# Altium PCB AD8310.PcbDoc
Units mil, origin at the board's own origin, x right, y up, seen from the top; angles counter-clockwise.
Board outline 1840 x 2314 mil, 2 copper layers (Top Layer, Bottom Layer); 26 components, 12 nets, 84 pads, 545 vias.
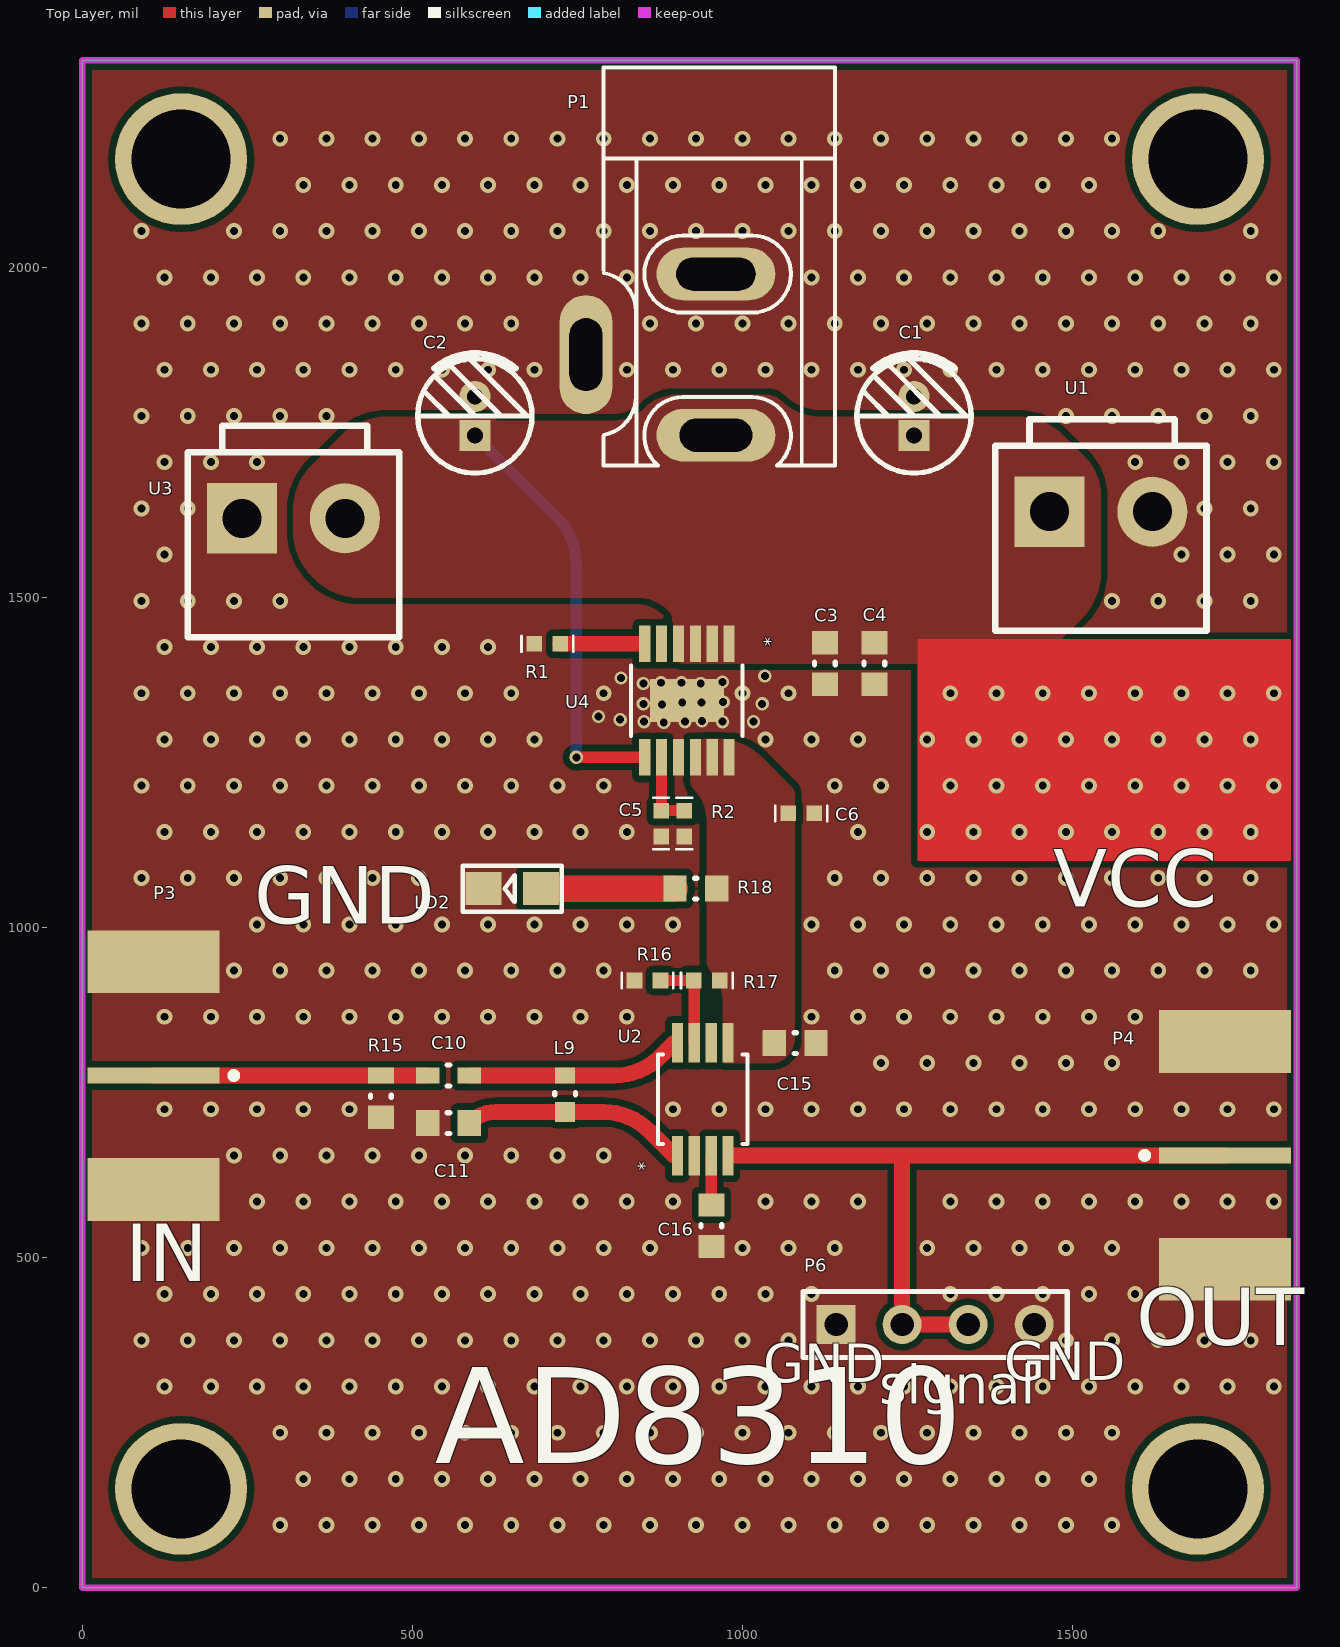
[diagram p0: Top Layer view]
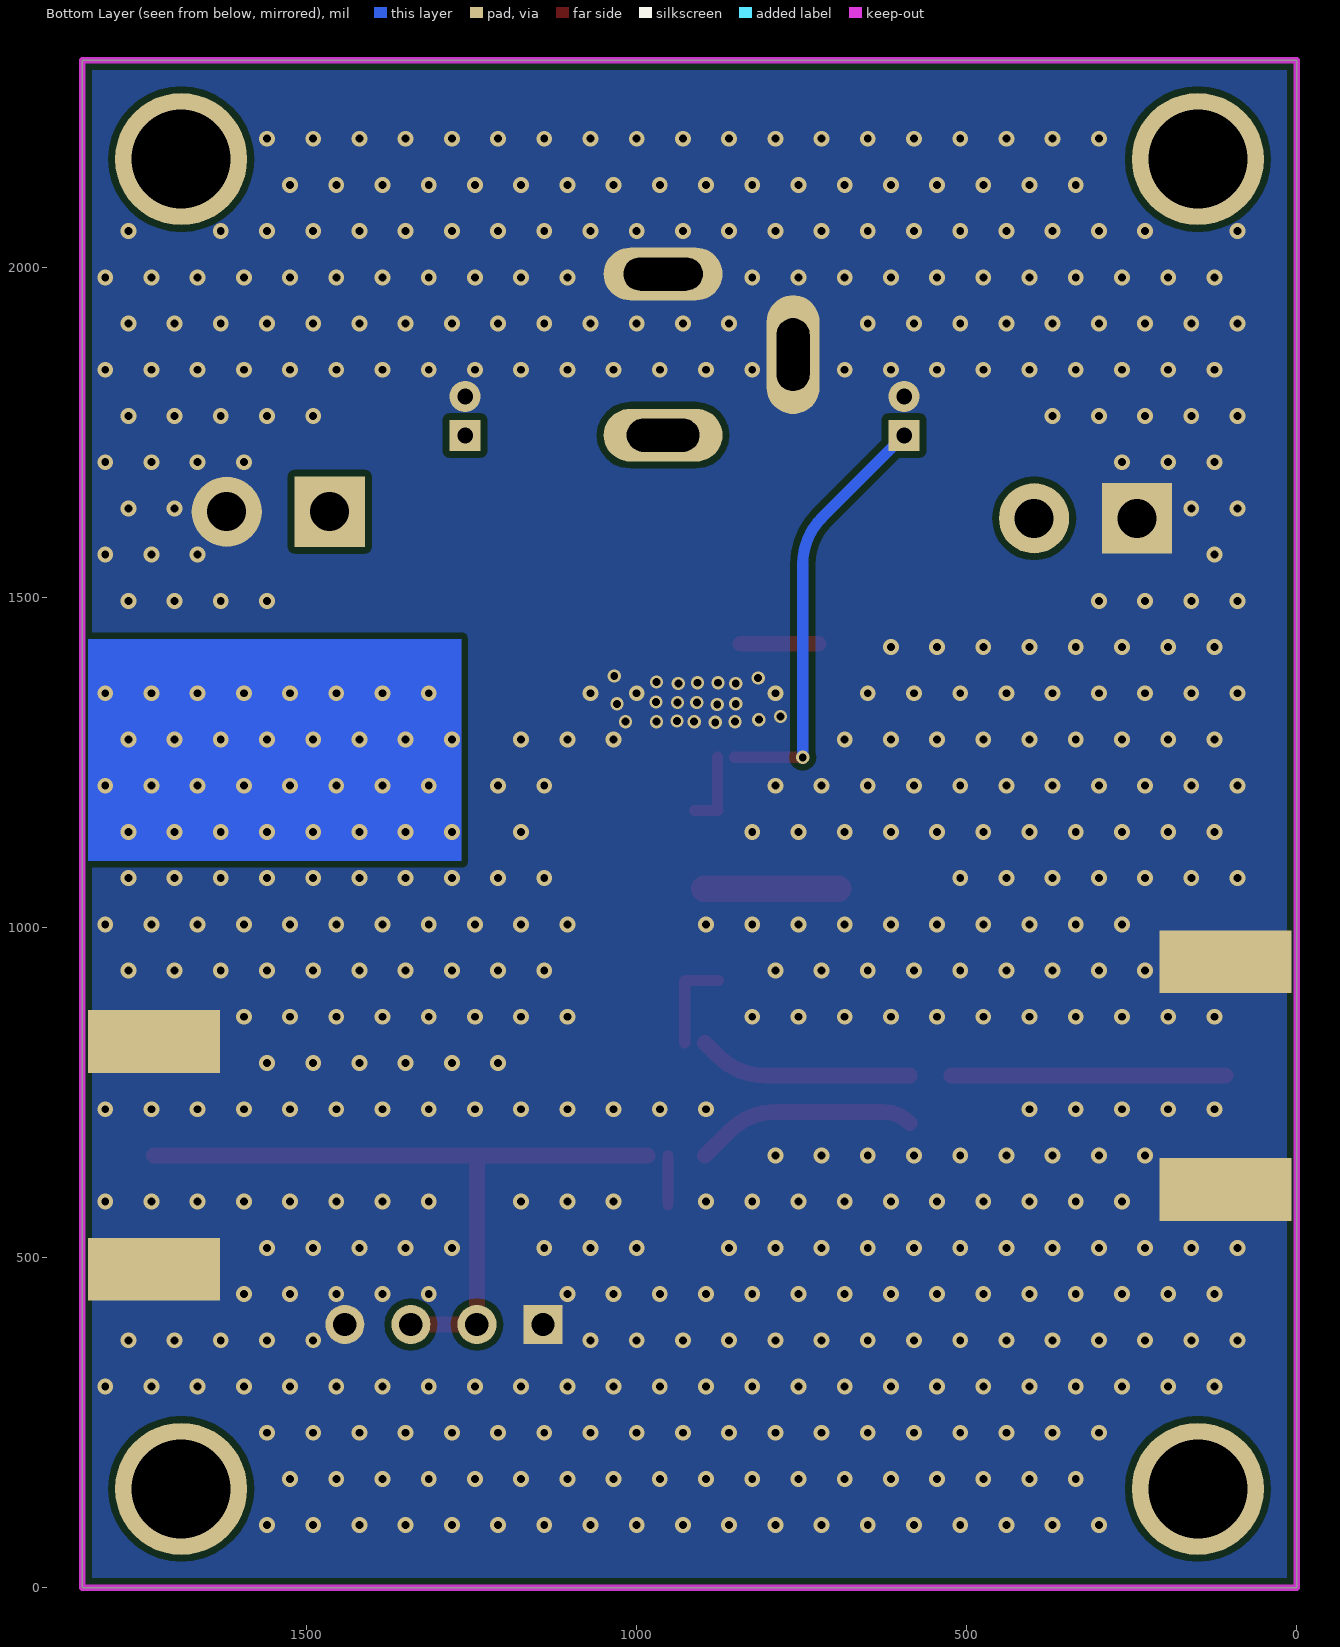
[diagram p1: Bottom Layer view, seen from below]

## Layer stack, top to bottom
Top Solder: solder mask 0.4, Solder Resist, Dk 3.5
Top Layer: signal copper 1.4
Dielectric 1: dielectric 12.6, FR-4, Dk 4.8
Bottom Layer: signal copper 1.4
Bottom Solder: solder mask 0.4, Solder Resist, Dk 3.5

## Board outline
0,0 1840,0 1840,2314 0,2314

## Design rules (kind name [scope] priority, off if disabled: settings)
Clearance [All] p1: gap=10 ignorepadtopadclearanceinfootprint=FALSE except(0: Arc-Hole Track-Hole SMDPad-Hole THPad-Hole Via-Hole Fill-Hole Poly-Hole Region-Hole Text-Hole)
PlaneConnect [All] p1: planeconnectstyle=Direct reliefexpansion=20 reliefentries=4 reliefconductorwidth=10 reliefairgap=10
PolygonConnect [All] p1: connectstyle=Direct reliefconductorwidth=10 reliefentries=4 polygonreliefangle="90 Angle" airgapwidth=10
RoutingVias [All] p1: holewidth=28 width=50 viastyle="Through Hole" minholewidth=28 minwidth=50 maxholewidth=28 maxwidth=50
SolderMaskExpansion [All] p1: expansion=4
Width [All] p1: maxlimit=90 minlimit=10 preferedwidth=17
29 further rules are at their usual default settings.

## Components (designator, comment, footprint, x,y, rotation, side; value= is the part's Value field where it differs from the comment)
C1 "0" "CAP 1.5*4*8" 1260,1775 r90 top
C2 "0" "CAP 1.5*4*8" 595,1775 r90 top
C3 "0" 0603C#1 1125,1400 r270 top
C4 "4.7uf" 0603C#1 1200,1400 r270 top
C5 "0.47uF" 0402 877,1177.37 r270 top
C6 "10uF" 0402 1109,1173 r180 top
C10 "uf" 0603C#2 555,776 r0 top
C11 "uf" 0603C#1 555,704 r0 top
C15 "uf" 0603C#1 1080,825 r180 top
C16 "100pF" 0603C#1 953,548.5 r90 top
L9 "BEAD" 0603L 731.5,748.5 r270 top value=100uH
LD2 "LED" SMDLED 695.04,1058.94 r180 top
P1 "DC005" DC10B 790,2165 r270 top
P3 "SMA" SMA 204,771 r0 top
P4 "SMA" SMA 1635,660 r180 top
P6 "Header 4" HDR1X4 1142,399 r0 top
R1 "0.5K" 0402 685,1430 r0 top
R2 "50K" 0402 912,1138 r90 top
R15 "1k" 0603R#1 452.5,744.5 r90 top
R16 "1k" 0402 836.63,920 r0 top
R17 "1k" 0402 926.63,920 r0 top
R18 "1k" 0603R#2 929.5,1059 r0 top
U1 "3.96" 3.96 1542.95,1630 r0 top
U2 "AD8310ARMZ" RM_8_ADI 940,740 r90 top
U3 "3.96" 3.96 320,1620 r0 top
U4 "LT3045EMSE" MSOP12-MSE-RevG_ADI 916.02,1343.98 r270 top

## Footprints (in the part's own frame and the unit in brackets; to place one, negate y for a bottom-side part, rotate by r counter-clockwise, add the part's x,y. Pads: shape width x height; smd on the part's side, far side on the other; paste and mask are expansions set on the pad)
3.96 [mm] "接插件，25V/5A"
  rect 2.7x2.7 hole 1.5: 1(-1.98,0)
  round 2.7 hole 1.5: 2(1.982,0)
  silkscreen extent -4.06,-4.57 4.07,3.56, body extent -3.98,-4.4 4.03,4.16, height 10.5
0402 [mm]
  rect 0.6x0.6 smd: 1(0,0) 2(1,0)
  silkscreen extent -0.5,-0.3 1.5,0.3
0603C#1 [mm] "Chip Capacitor, Body 1.6x0.8mm, Height 1.0mm, IPC Medium Density"
  rect 0.9x1 smd: 1(-0.8,0) 2(0.8,0)
  silkscreen extent -0.05,-0.4 0.05,0.4, body extent -0.87,-0.48 0.88,0.47, height 1
0603C#2 [mm] "Chip Capacitor, Body 1.6x0.8mm, Height 1.0mm, IPC Medium Density"
  rect 0.9x0.61 smd: 1(-0.8,0) 2(0.8,0)
  silkscreen extent -0.05,-0.4 0.05,0.4, body extent -0.87,-0.48 0.88,0.47, height 1
0603L [mil] "Bead 0603L"
  rect 30x30 smd: 1(27.5,0)
  rect 24x30 smd: 2(-27.5,0)
  silkscreen extent -2,-16 2,16, body extent -34,-19 34,19, height 24
0603R#1 [mm] "Chip Resistor, Body 1.6x0.8mm, IPC Medium Density"
  rect 0.9x1 smd: 1(-0.8,0)
  rect 0.61x1 smd: 2(0.8,0)
  silkscreen extent -0.05,-0.4 0.05,0.4, body extent -0.85,-0.47 0.85,0.47, height 0.6
0603R#2 [mm] "Chip Resistor, Body 1.6x0.8mm, IPC Medium Density"
  rect 0.9x1 smd: 1(-0.8,0) 2(0.8,0)
  silkscreen extent -0.05,-0.4 0.05,0.4, body extent -0.85,-0.47 0.85,0.47, height 0.6
"CAP 1.5*4*8" [mm] "脚距1.5mm直径4mm高度8mm"
  rect 1.2x1.2 hole 0.6: 1(-0.75,0)
  round 1.2 hole 0.6: 2(0.75,0)
  silkscreen extent -2.2,-2.2 2.41,2.2, body extent -2,-2 2.02,2, height 8.04
DC10B [mil]
  oval 80x180 hole 50 slot 110 at 90 deg: 1(419.09,170)
  oval 80x180 hole 50 slot 120 at 90 deg: 2(175,170)
  oval 180x80 hole 50 slot 110 at 0 deg: 3(297.05,-26.85)
  silkscreen extent -138,0 465,350
HDR1X4 [mm]
  rect 1.5x1.5 hole 0.9: 1(0,0)
  round 1.5 hole 0.9: 2(2.54,0) 3(5.08,0) 4(7.62,0)
  silkscreen extent -1.27,-1.27 8.89,1.27
MSOP12-MSE-RevG_ADI [mm]
  rect 1.393x0.431 smd paste+0 mask+0: 1(-2.185,1.625) 2(-2.185,0.975) 3(-2.185,0.325) 4(-2.185,-0.325) 5(-2.185,-0.975) 6(-2.185,-1.625) 7(2.185,-1.625) 8(2.185,-0.975) 9(2.185,-0.325) 10(2.185,0.325) 11(2.185,0.975) 12(2.185,1.625)
  rect 1.651x2.845 smd paste-1.41 mask+0: EPAD(0,0)
  silkscreen extent -1.36,-2.15 1.36,2.15, body extent 0,0 0.25,0.25, height 0.25
RM_8_ADI [mil]
  rect 60x17 smd paste+0 mask+0: 1(-85.5,38.39) 2(-85.5,12.8) 3(-85.5,-12.8) 4(-85.5,-38.39) 5(85.5,-38.39) 6(85.5,-12.8) 7(85.5,12.8) 8(85.5,38.39)
  silkscreen extent -68,-68 68,68
SMA [mil]
  rect 200x24 smd: 1(-96,5)
  rect 200x95 smd: 2(-96,-167.5) 2(-96,177.5)
  rect 200x95 smd far side: 2(-96,-167.5) 2(-96,177.5) 2(-96,177.5)
  silkscreen extent 21,0 31,10, body extent -571,-183 -9,192, height 171
SMDLED [mm]
  rect 1.4x1.27 smd: 1(0.001,-0.002) 2(2.211,-0.002)
  silkscreen extent -0.8,-0.89 3.01,0.89

## Part data
C1 C2 C3 C4 C5 C6 C10 C11 C15 C16: library part C, "Capacitor"
L9: library part Inductor, "Inductor", Published=8-Jun-2000, Publisher="Altium Limited", Revision="July-2002: Re-released for DXP Platform."
LD2: "Typical RED, GREEN, YELLOW, AMBER GaAs LED", PackageDocument=Feb-2002, LatestRevisionDate=17-Jul-2002, LatestRevisionNote="Re-released for DXP Platform.", PackageReference=3.2X1.6X1.1, Published=8-Jun-2000, Publisher="Altium Limited"
P3 P4: "SMA Connector"
P6: "Header, 4-Pin", LatestRevisionDate=17-Jul-2002, LatestRevisionNote="Re-released for DXP Platform.", Publisher="Altium Limited"
R1 R2 R15 R16 R17 R18: library part Resistor, "Resistor"
U2 U4: "No Description Available", Copyright="Copyright (C) 2018 Accelerated Designs. All rights reserved", RefDes=RefDes, Type=DEV, Vendor="Analog Devices Inc"
  U2: Built_By=EMA_UL_Team, Manufacturer_Part_Number=AD8310ARMZ, SourceLibrary=Analog_2012-01-01_5
  U4: Built_By=SunStream, Manufacturer_Part_Number=LT3045EMSE, SourceLibrary=Analog_Devices_Inc_2020-09-15

## Free pads (board coordinates)
  round 200 hole 150: 3(150,150) 3(150,2164) 3(1690,150) 3(1690,2164)

## Via types
v1: diameter 24, hole 12, Top Layer to Bottom Layer, tented both sides, 523 vias
v2: diameter 20, hole 12, Top Layer to Bottom Layer, tented both sides, 22 vias

## Nets (pads, with @x,y where several pads share a name; then routed paths per layer and width w, separated by ;. In a path a pad name is that pad's centre, name@x,y a point inside that pad or via, vN(x,y) a via of type N, cw(c..) or ccw(c..) an arc to the next point about the centre after c; other vN are vias at no path point)
5V: C6.2 C15.2 R17.2 R18.2 U2.5 U4.10 U4.11 U4.12
GND: C1.2 C2.2 C3.2 C4.2 C5.2 C6.1 C11.1 C15.1 C16.1 LD2.2 P1.2 P1.3 P3.2 P4.2 P6.1 P6.4 R1.1 R2.1 R15.1 R16.1 U1.2 U2.2 U3.1 U4.9 U4.EPAD
  other v1: 300,95 370,95 440,95 510,95 580,95 650,95 720,95 790,95 860,95 930,95 1000,95 1070,95 1140,95 1210,95 1280,95 1350,95 1420,95 1490,95 1560,95 335,165 405,165 475,165 545,165 615,165 685,165 755,165 825,165 895,165 965,165 1035,165 1105,165 1175,165 1245,165 1315,165 1385,165 1455,165 1525,165 300,235 370,235 440,235 510,235 580,235 650,235 720,235 790,235 860,235 930,235 1000,235 1070,235 1140,235 1210,235 1280,235 1350,235 1420,235 1490,235 1560,235 125,305 195,305 265,305 335,305 405,305 475,305 545,305 615,305 685,305 755,305 825,305 895,305 965,305 1035,305 1105,305 1175,305 1245,305 1315,305 1385,305 1455,305 1525,305 1595,305 1665,305 1735,305 1805,305 90,375 160,375 230,375 300,375 370,375 440,375 510,375 580,375 650,375 720,375 790,375 860,375 930,375 1000,375 1070,375 1490,375 1560,375 1630,375 1700,375 1770,375 125,445 195,445 265,445 335,445 405,445 475,445 545,445 615,445 685,445 755,445 825,445 895,445 965,445 1035,445 1105,445 1315,445 1385,445 1455,445 1525,445 1595,445 90,515 160,515 230,515 300,515 370,515 440,515 510,515 580,515 650,515 720,515 790,515 860,515 1000,515 1070,515 1140,515 1280,515 1350,515 1420,515 1490,515 1560,515 265,585 335,585 405,585 475,585 545,585 615,585 685,585 755,585 825,585 895,585 1035,585 1105,585 1175,585 1315,585 1385,585 1455,585 1525,585 1595,585 1665,585 1735,585 1805,585 230,655 300,655 370,655 440,655 510,655 580,655 650,655 720,655 790,655 125,725 195,725 265,725 335,725 405,725 895,725 965,725 1035,725 1105,725 1175,725 1245,725 1315,725 1385,725 1455,725 1525,725 1595,725 1665,725 1735,725 1805,725 1210,795 1280,795 1350,795 1420,795 1490,795 1560,795 125,865 195,865 265,865 335,865 405,865 475,865 545,865 615,865 685,865 755,865 825,865 1105,865 1175,865 1245,865 1315,865 1385,865 1455,865 1525,865 1595,865 230,935 300,935 370,935 440,935 510,935 580,935 650,935 720,935 790,935 1140,935 1210,935 1280,935 1350,935 1420,935 1490,935 1560,935 1630,935 1700,935 1770,935 265,1005 335,1005 405,1005 475,1005 545,1005 615,1005 685,1005 755,1005 825,1005 895,1005 1105,1005 1175,1005 1245,1005 1315,1005 1385,1005 1455,1005 1525,1005 1595,1005 1665,1005 1735,1005 1805,1005 90,1075 160,1075 230,1075 300,1075 370,1075 440,1075 510,1075 1140,1075 1210,1075 1280,1075 1350,1075 1420,1075 1490,1075 1560,1075 1630,1075 1700,1075 1770,1075 125,1145 195,1145 265,1145 335,1145 405,1145 475,1145 545,1145 615,1145 685,1145 755,1145 825,1145 1175,1145 90,1215 160,1215 230,1215 300,1215 370,1215 440,1215 510,1215 580,1215 650,1215 720,1215 790,1215 1140,1215 1210,1215 125,1285 195,1285 265,1285 335,1285 405,1285 475,1285 545,1285 615,1285 685,1285 1035,1285 1105,1285 1175,1285 90,1355 160,1355 230,1355 300,1355 370,1355 440,1355 510,1355 580,1355 650,1355 790,1355 1000,1355 1070,1355 125,1425 195,1425 265,1425 335,1425 405,1425 475,1425 545,1425 615,1425 90,1495 160,1495 230,1495 300,1495 1560,1495 1630,1495 1700,1495 1770,1495 125,1565 1665,1565 1735,1565 1805,1565 90,1635 160,1635 1700,1635 1770,1635 125,1705 195,1705 265,1705 1595,1705 1665,1705 1735,1705 1805,1705 90,1775 160,1775 230,1775 300,1775 370,1775 1490,1775 1560,1775 1630,1775 1700,1775 1770,1775 125,1845 195,1845 265,1845 335,1845 405,1845 475,1845 545,1845 615,1845 685,1845 825,1845 895,1845 965,1845 1035,1845 1105,1845 1175,1845 1245,1845 1315,1845 1385,1845 1455,1845 1525,1845 1595,1845 1665,1845 1735,1845 1805,1845 90,1915 160,1915 230,1915 300,1915 370,1915 440,1915 510,1915 580,1915 650,1915 860,1915 930,1915 1000,1915 1070,1915 1140,1915 1210,1915 1280,1915 1350,1915 1420,1915 1490,1915 1560,1915 1630,1915 1700,1915 1770,1915 125,1985 195,1985 265,1985 335,1985 405,1985 475,1985 545,1985 615,1985 685,1985 755,1985 825,1985 1105,1985 1175,1985 1245,1985 1315,1985 1385,1985 1455,1985 1525,1985 1595,1985 1665,1985 1735,1985 1805,1985 90,2055 230,2055 300,2055 370,2055 440,2055 510,2055 580,2055 650,2055 720,2055 790,2055 860,2055 930,2055 1000,2055 1070,2055 1140,2055 1210,2055 1280,2055 1350,2055 1420,2055 1490,2055 1560,2055 1630,2055 1770,2055 335,2125 405,2125 475,2125 545,2125 615,2125 685,2125 755,2125 825,2125 895,2125 965,2125 1035,2125 1105,2125 1175,2125 1245,2125 1315,2125 1385,2125 1455,2125 1525,2125 300,2195 370,2195 440,2195 510,2195 580,2195 650,2195 720,2195 790,2195 860,2195 930,2195 1000,2195 1070,2195 1140,2195 1210,2195 1280,2195 1350,2195 1420,2195 1490,2195 1560,2195
  other v2: 881,1311 851,1312 913,1312 970,1312 1017,1312 939,1313 815,1315 782,1320 878,1338 850,1339 1030,1339 909,1341 938,1341 971,1342 850,1370 937,1370 877,1371 908,1371 970,1372 816,1378 1034,1381
NetC5_1: C5.1 R2.2 U4.8 | length 115.8
  Top Layer w17: U4.8 877.64,1178.91 cw(c875.46,1178.91) C5.1 R2.2
NetC10_1: C10.1 P3.1 R15.2 | length 415.5
  Top Layer w24: P3.1 R15.2 C10.1
NetC10_2: C10.2 L9.2 U2.8 | length 326.4
  Top Layer w24: C10.2 L9.2 805.78,776 ccw(c805.78,876) 876.49,805.29 U2.8@896.7,825.5
NetC11_2: C11.2 L9.1 U2.1 | length 338
  Top Layer w24: C11.2 cw(c627.54,662.96) 627.54,721 L9.1 788.78,721 cw(c788.78,621) 859.49,691.71 U2.1@896.7,654.5
NetC16_2: C16.2 U2.3 | length 74.3
  Top Layer w17: C16.2@952.8,580.2 U2.3
NetLD2_1: LD2.1 R18.1 | length 203
  Top Layer w40: LD2.1 R18.1
NetP4_1: P4.1 P6.2 P6.3 U2.4 | length 1104.4
  Top Layer w24: U2.4@983.3,654.5 cw(c984.5,653.29) 984.5,655 1240,655 ; P6.3 P6.2 1242,650.17 ccw(c1235.17,650.17) 1240,655 ; P4.1 1240,655
NetR1_2: R1.2 U4.6 | length 118.6
  Top Layer w24: R1.2 843,1430
NetR16_2: R16.2 R17.1 U2.7 | length 145.3
  Top Layer w17: R16.2 R17.1 cw(c925.24,918.61) 927.2,918.61 U2.7
VCC: C1.1 C2.1 C3.1 C4.1 P1.1 U1.1 U3.2 U4.1 U4.2 U4.3 U4.4 U4.7 | length 650.3
  Top Layer w17: v2(748.53,1257.95) U4.7
  Bottom Layer w17: C2.1 719.24,1621.23 cw(c648.53,1550.52) 748.53,1550.52 v2(748.53,1257.95)
  other v1: 1280,1145 1350,1145 1420,1145 1490,1145 1560,1145 1630,1145 1700,1145 1770,1145 1315,1215 1385,1215 1455,1215 1525,1215 1595,1215 1665,1215 1735,1215 1805,1215 1280,1285 1350,1285 1420,1285 1490,1285 1560,1285 1630,1285 1700,1285 1770,1285 1315,1355 1385,1355 1455,1355 1525,1355 1595,1355 1665,1355 1735,1355 1805,1355
pads on no net: U2.6 U4.5

## Polygon pours and split planes (outlines as drawn)
GND on Top Layer "Top Layer-No Net" (solid, pour order 14): 0,2314 1840,2314 1840,0 0,0
5V on Top Layer "Top Layer-No Net" (solid, pour order 4): 931,1285 ccw(c955.14,1260.86) 921,1260.86 921,1224.9 ccw(c944.9,1224.9) 928,1208 cw(c884.54,1164.54) 946,1164.54 946,951.31 ccw(c973.31,951.31) 954,932 cw(c915.37,893.37) 970,893.37 970,795 1045.27,795 ccw(c1045.27,825.73) 1067,804 ccw(c1038.03,832.97) 1079,832.97 1079,1203.34 ccw(c1065.34,1203.34) 1075,1213 1031.29,1256.71 ccw(c960.58,1186) 960.58,1286 942,1286
VCC on Top Layer "Top Layer-No Net" (solid, pour order 0): 462.42,1774 ccw(c462.42,1674) 391.71,1744.71 349.29,1702.29 ccw(c420,1631.58) 320,1631.58 320,1601.42 ccw(c420,1601.42) 349.29,1530.71 351,1529 ccw(c421.01,1599.01) 421.01,1500 839.72,1500 cw(c839.72,1431.72) 888,1480 cw(c873.51,1465.51) 894,1465.51 894,1419 ccw(c913.31,1419) 899.66,1405.34 902,1403 ccw(c909.24,1410.24) 909.24,1400 1407.82,1400 ccw(c1407.82,1492.18) 1473,1427 1513.71,1467.71 ccw(c1443,1538.42) 1543,1538.42 1543,1653.64 ccw(c1457.64,1653.64) 1518,1714 1487.29,1744.71 ccw(c1416.58,1674) 1416.58,1774 1116.94,1774 cw(c1116.94,1855.94) 1059,1798 ccw(c1037.27,1776.27) 1037.27,1807 898.87,1807 ccw(c898.87,1742.13) 853,1788 cw(c804.72,1836.28) 804.72,1768 629,1768 ccw(c614.51,1753.51) 614.51,1774
GND on Bottom Layer "Top Layer-No Net" (solid, pour order 16): 0,2314 1840,2314 1840,0 0,0

## Keep-outs
Keep-Out Layer:
  lines w10: 0,0 0,2314 82,2314 1840,2314 1840,2305 1840,0 0,0

## Other copper
Top Layer:
  rectangle net VCC: 1265,1101 1831,1437
Bottom Layer:
  rectangle net VCC: 1265,1101 1831,1437

## Silkscreen, mask and mechanical layers (free items; w line width, h text height)
Top Overlay:
  text "VCC" at 1471,1003 h150
  text "GND" at 261,977 h150
  text "IN" at 65,436 h150
  text "OUT" at 1597,339 h150
  text "GND" at 1397,295 h100
  text "GND" at 1032,292 h100
  text "signal" at 1207,259 h100
  text "AD8310" at 534,141 h250
Top Solder:
  rectangle: 11,1062 548,1429
  rectangle: 1265,1100 1831,1436
Bottom Solder:
  rectangle: 776,1248 1098,1454
  rectangle: 11,1062 548,1429
  rectangle: 1266,1099 1832,1435

## Text inside footprints (layer, text, board x,y; h text height)
U2: Top Overlay "*" at 861,632 h20 r90
U4: Top Overlay "*" at 1025,1440 h20 r270